# EAGLE board lightmeter_proto3 (EAGLE 7.1.0)
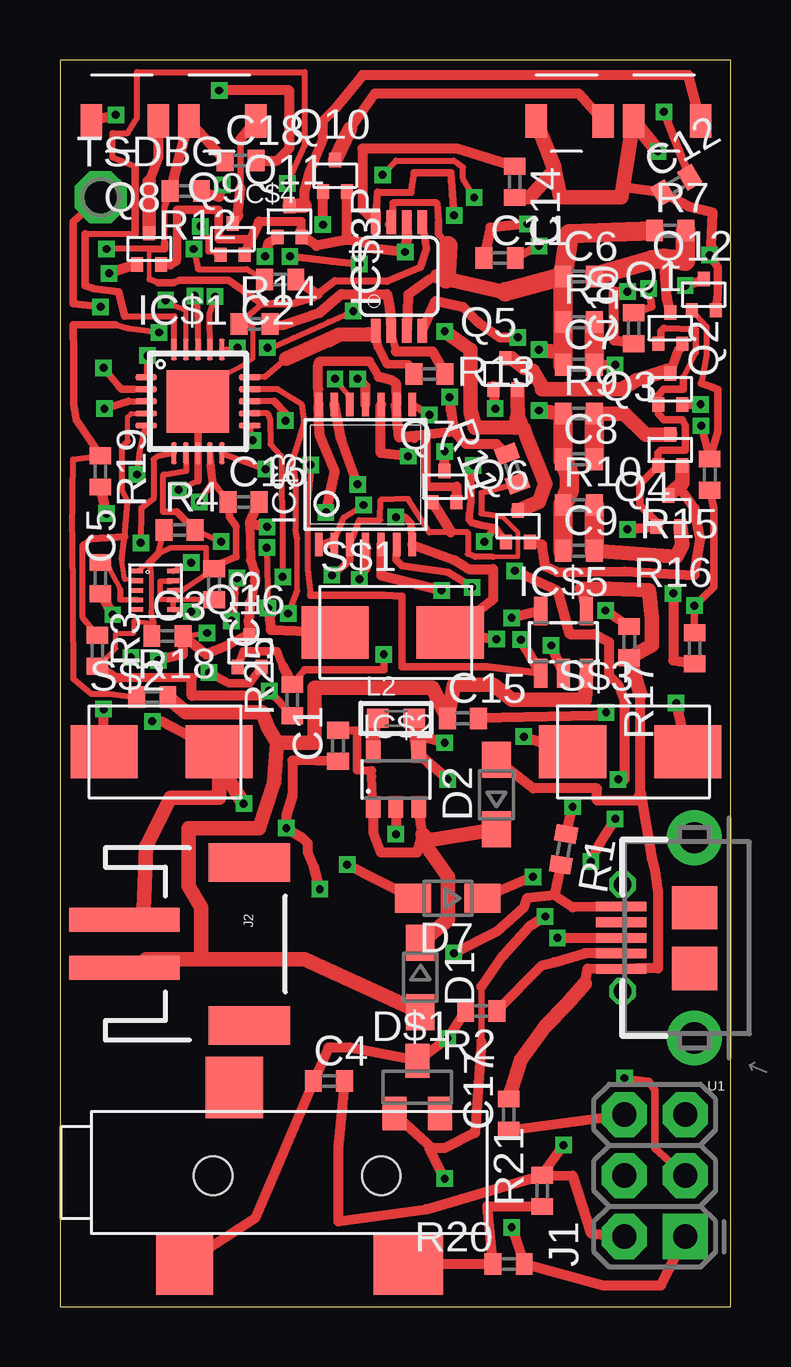
[diagram p0: board, top side]
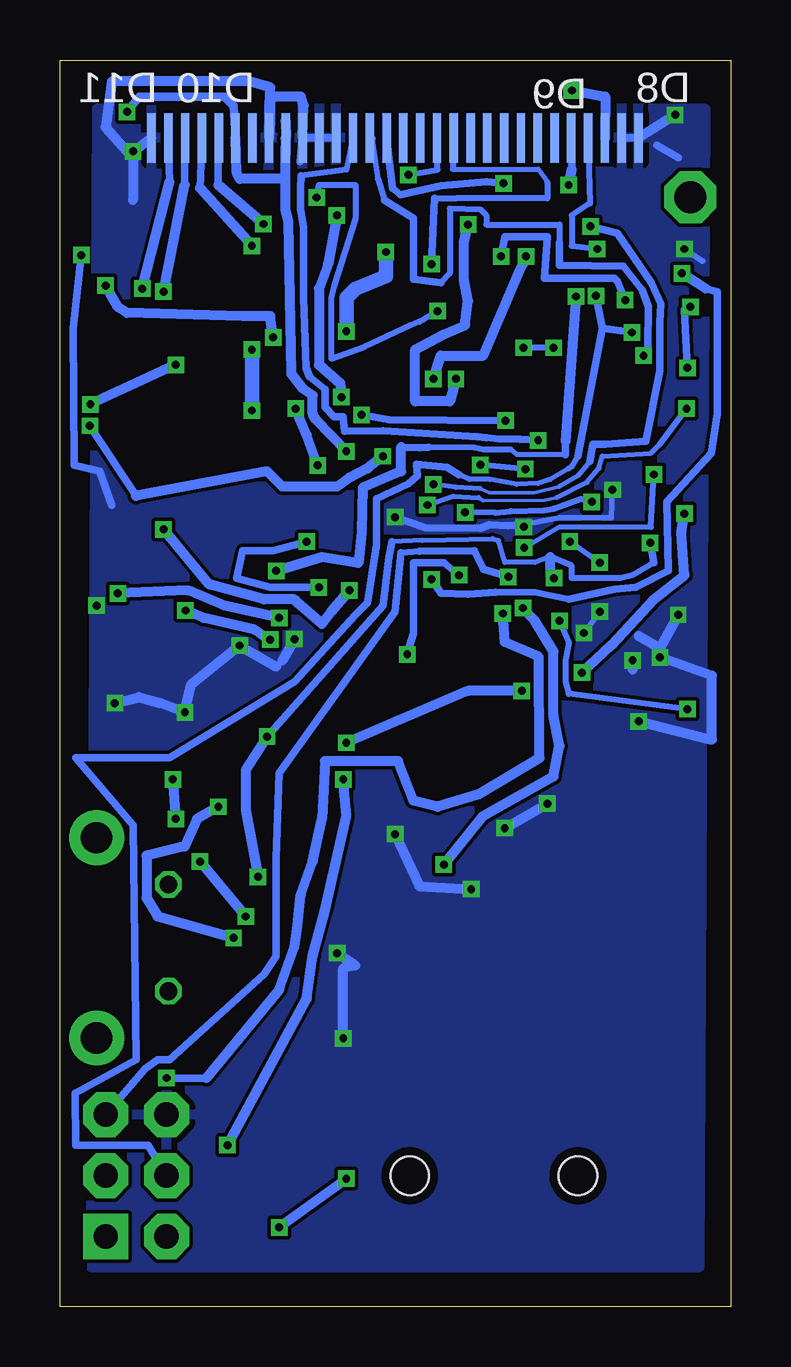
[diagram p1: board, bottom side, seen from below]

Size 27.98 x 51.94 mm. Coordinates in mm from the lower left corner, seen from the top.
Outline: 0,0 27.98,0 27.98,51.94 0,51.94 0,0
Copper layers (1*16): Top 0.0356mm / dielectric 1.5011mm / Bottom 0.0356mm
Design rules "LaenPCBOrder": minimum track width 6mil, minimum drill 13mil, track to track 6mil, track to pad 6mil, pad to pad 6mil, via to via 6mil, smd to smd 6mil, copper to edge 15mil, drill to drill 6mil, minimum pad ring 7mil, minimum via ring 7mil, stop-mask expansion 3mil, vias tented up to drill 0mil, thermal gap 10mil

## Footprints (pad centres in the part's own frame; a part is rotated, then mirrored left to right if it is on the bottom)
C0402 = smd 0.7 x 0.9: 1 -0.65,0; 2 0.65,0
SOD323-W = smd 1.5 x 1.2: A 1.45,0; C -1.45,0
VEMD2523SLX01 = smd 0.889 x 1.397: P$1 -3.81,3.81; P$2 -1.016,3.81
SOT23 = smd 1 x 1.4: 1 -0.95,-1.1; 2 0.95,-1.1; 3 0,1.1
MLF20 = smd 0.9 x 0.23: 1 -2.159,1.001; 2 -2.159,0.5; 3 -2.159,0; 4 -2.159,-0.5; 5 -2.159,-1.001; 11 2.159,-1.001; 12 2.159,-0.5; 13 2.159,0; 14 2.159,0.5; 15 2.159,1.001 | smd 0.23 x 0.9: 6 -1.001,-2.159; 7 -0.5,-2.159; 8 0,-2.159; 9 0.5,-2.159; 10 1.001,-2.159; 16 1.001,2.159; 17 0.5,2.159; 18 0,2.159; 19 -0.5,2.159; 20 -1.001,2.159 | smd 2.6 x 2.6: GND 0,0
SOT23-5 = smd 0.6 x 0.9: 1 -0.95,-1.15; 2 0,-1.15; 3 0.95,-1.15; 4 0.95,1.15; 5 -0.95,1.15
TSSOP14 = smd 0.305 x 0.991: 1 -1.95,-2.918; 2 -1.3,-2.918; 3 -0.65,-2.918; 4 0,-2.918; 5 0.65,-2.918; 6 1.3,-2.918; 7 1.95,-2.918; 8 1.95,2.918; 9 1.3,2.918; 10 0.65,2.918; 11 0,2.918; 12 -0.65,2.918; 13 -1.3,2.918; 14 -1.95,2.918
MSOP08 = smd 0.4 x 1: 1 -0.976,-2.263; 2 -0.326,-2.263; 3 0.324,-2.263; 4 0.974,-2.263; 5 0.974,2.262; 6 0.324,2.262; 7 -0.326,2.262; 8 -0.976,2.262
UG-2864HSWEG01_0.96IN_WRAPAROUND = smd 0.35 x 2.057 bottom: 1 -10.15,-1.2; 2 -9.45,-1.2; 3 -8.75,-1.2; 4 -8.05,-1.2; 5 -7.35,-1.2; 6 -6.65,-1.2; 7 -5.95,-1.2; 8 -5.25,-1.2; 9 -4.55,-1.2; 10 -3.85,-1.2; 11 -3.15,-1.2; 12 -2.45,-1.2; 13 -1.75,-1.2; 14 -1.05,-1.2; 15 -0.35,-1.2; 16 0.35,-1.2; 17 1.05,-1.2; 18 1.75,-1.2; 19 2.45,-1.2; 20 3.15,-1.2; 21 3.85,-1.2; 22 4.55,-1.2; 23 5.25,-1.2; 24 5.95,-1.2; 25 6.65,-1.2; 26 7.35,-1.2; 27 8.05,-1.2; 28 8.75,-1.2; 29 9.45,-1.2; 30 10.15,-1.2
SOT23-5L = smd 0.55 x 1.2: 1 -0.95,-1.3; 2 0,-1.3; 3 0.95,-1.3; 4 0.95,1.3; 5 -0.95,1.3
DFN-10 = smd 0.191 x 0.5: P$1 -0.8,-0.749; P$2 -0.4,-0.749; P$3 0,-0.749; P$4 0.4,-0.749; P$5 0.8,-0.749; P$6 0.8,0.749; P$7 0.4,0.749; P$8 0,0.749; P$9 -0.4,0.749; P$10 -0.8,0.749
2X3-NS = drill 1.016 pad 1.88 square: 1 -2.54,-1.27 | drill 1.016 pad 1.88 octagon: 2 -2.54,1.27; 3 0,-1.27; 4 0,1.27; 5 2.54,-1.27; 6 2.54,1.27
JST-2-SMD = smd 1 x 4.6: 1 -1,-3.7; 2 1,-3.7 | smd 1.6 x 3.4: NC1 -3.4,1.5; NC2 3.4,1.5
_0603 = smd 0.9 x 0.8: 1 -0.762,0; 2 0.762,0
SOT-416-3 = smd 0.5 x 0.6: P$1 -0.5,-0.9; P$2 0.5,-0.9; P$3 0,0.4
R0402 = smd 0.7 x 0.9: 1 -0.65,0; 2 0.65,0
BUTTON = smd 2.8 x 2.2: P$1 -2.54,0; P$3 2.26,0
P1-13 = drill 1.321 pad 2.159 octagon: TP 0,0
USB-AB-MICRO = smd 2.1 x 0.4: D+ 3.05,0; D- 3.05,0.65; GND 3.05,-1.3; ID 3.05,-0.65; VBUS 3.05,1.3 | drill 1.3 pad 2.286: P$1 0,-4.175; P$2 0,4.175 | drill 0.737 pad 0.762 octagon: P$3 3,-2.225; P$4 3,2.225 | smd 1.9 x 1.8: P$6 0,1.275; P$7 0,-1.25
3TRS-SMD = smd 2.388 x 2.553: P$1 -6.274,-1.27; P$2 -4.191,6.083 | smd 2.896 x 2.553: P$3 3.048,-1.27 | hole 1.6: -5.08,2.407; 1.93,2.407

## Placement (x,y rotation side)
C1  4u7  [C0402]  11.6,23.37 90 top
C2  2u2  [C0402]  9.18,42.8 180 top
C3  1u  [C0402]  4.48,27.94 0 top
C4  u1  [C0402]  11.21,9.4 0 top
C5  u1  [C0402]  1.69,30.35 90 top
C6  4u7  [C0402]  21.63,42.93 0 top
C7  4u7  [C0402]  21.63,39.24 0 top
C8  4u7  [C0402]  21.63,35.31 0 top
C9  4u7  [C0402]  21.63,31.5 0 top
C10  1u  [C0402]  23.91,40.77 90 top
C11  1u  [C0402]  18.33,43.69 0 top
C12  4u7  [C0402]  25.69,46.74 30 top
C13  u1  [C0402]  6.43,30.1 270 top
C14  u1  [C0402]  18.96,46.86 270 top
C15  4u7  [C0402]  16.8,24.51 0 top
C16  u1  [C0402]  7.66,33.53 0 top
C17  4u7  [C0402]  18.71,8 90 top
C18  2u2  [C0402]  7.53,47.75 0 top
D1  [SOD323-W]  15.02,13.72 270 top
D2  [SOD323-W]  18.2,21.34 90 top
D7  [SOD323-W]  16.17,17.02 180 top
D8  VEMD2523SLX01  [VEMD2523SLX01]  5.12,45.59 0 top
D9  VEMD2523SLX01  [VEMD2523SLX01]  9.18,45.59 0 top
D10  VEMD2523SLX01  [VEMD2523SLX01]  23.66,45.59 0 top
D11  VEMD2523SLX01  [VEMD2523SLX01]  27.72,45.59 0 top
D$1  GSOT04-E3-08  [SOT23]  14.9,9.14 0 top
IC$1  ATTINY1634MLF20  [MLF20]  5.75,37.72 0 top
IC$2  LM3671  [SOT23-5]  14.01,21.97 0 top
IC$3  SN74HC164TSSOP-14  [TSSOP14]  12.74,34.67 0 top
IC$3P  AD8542RM  [MSOP08]  14.14,42.93 0 top
IC$4  [UG-2864HSWEG01_0.96IN_WRAPAROUND]  14.01,47.5 180 top
IC$5  MCP73831/OT  [SOT23-5L]  20.99,27.69 0 top
IC$6  MMA8653  [DFN-10]  3.98,29.84 270 top
J1  AVR_SPI_PRG_6NS  [2X3-NS]  24.8,5.46 90 top
J2  [JST-2-SMD]  6.39,15.11 270 top
L2  2u2  [_0603]  14.01,24.51 0 top
Q1  NCHANNELMOSFET  [SOT-416-3]  25.44,41.02 0 top
Q2  PCHANNELMOSFET  [SOT-416-3]  25.44,38.48 0 top
Q3  NCHANNELMOSFET  [SOT-416-3]  25.44,35.94 0 top
Q4  PCHANNELMOSFET  [SOT-416-3]  25.36,33.4 0 top
Q5  NCHANNELMOSFET  [SOT-416-3]  18.58,39.12 0 top
Q6  PCHANNELMOSFET  [SOT-416-3]  19.09,32.77 0 top
Q7  PCHANNELMOSFET  [SOT-416-3]  16.04,34.42 0 top
Q8  NCHANNELMOSFET  [SOT-416-3]  3.72,44.32 0 top
Q9  NCHANNELMOSFET  [SOT-416-3]  7.2,44.73 0 top
Q10  NCHANNELMOSFET  [SOT-416-3]  11.47,47.37 0 top
Q11  NCHANNELMOSFET  [SOT-416-3]  9.56,45.47 0 top
Q12  NCHANNELMOSFET  [SOT-416-3]  26.84,42.42 0 top
Q16  PCHANNELMOSFET  [SOT-416-3]  7.91,27.56 0 top
R1  15k  [R0402]  20.99,19.05 80 top
R2  15k  [R0402]  17.56,12.32 0 top
R3  1k  [R0402]  1.56,27.33 90 top
R4  1k  [R0402]  4.99,32.36 0 top
R7  750k%  [R0402]  25.44,44.83 0 top
R8  97.5k%  [R0402]  21.63,41.02 0 top
R9  13k%  [R0402]  21.63,37.21 0 top
R10  1k6%  [R0402]  21.63,33.4 0 top
R11  10k  [R0402]  18.86,34.93 110 top
R12  390k  [R0402]  5.25,46.48 0 top
R13  ???%  [R0402]  15.41,38.86 0 top
R14  ???%  [R0402]  8.12,40.94 0 top
R15  10k  [R0402]  27.09,34.67 270 top
R16  10k  [R0402]  26.45,27.43 90 top
R17  10k  [R0402]  23.74,27.69 270 top
R18  10k  [R0402]  3.85,25.4 0 top
R19  6k8%  [R0402]  1.69,34.8 90 top
R20  6k8  [R0402]  18.71,1.78 180 top
R21  16k  [R0402]  20.1,4.83 90 top
R25  10k  [R0402]  9.69,25.27 90 top
S$1  SMALLPUSHBUTTON  [BUTTON]  14.01,28.09 0 top
S$2  SMALLPUSHBUTTON  [BUTTON]  4.38,23.11 0 top
S$3  SMALLPUSHBUTTON  [BUTTON]  23.91,23.11 0 top
TSDBG  TPPAD1-13  [P1-13]  1.69,46.23 0 top
U1  [USB-AB-MICRO]  26.45,15.37 180 top
U$3  3TRS_PHONE_JACK  [3TRS-SMD]  11.47,3.05 0 top

## Library data of the parts
C1-C18 = rcl
D1 D2 D7 = diode2
D8-D11 D$1 IC$2 IC$3 IC$6 Q1-Q12 Q16 R13 S$1-S$3 U1 U$3 = lightmeter
IC$1 = attiny1634_corrected
IC$3P = analog-devices; MPN: AD8542ARZ; OC_FARNELL: 1464965; OC_NEWARK: 19M0965
IC$4 L2 = microbuilder
IC$5 = adafruit
J1 = SparkFun-Connectors
J2 = SparkFun-Connectors; PROD_ID: CONN-08352
R1-R4 R7-R12 R14-R21 R25 = resistor; SPICEPREFIX: R
TSDBG = testpad

## Nets
ACCSCL: IC$1.4 IC$6.P$2 R3.2
ACCSDA: IC$1.7 IC$6.P$10 R4.2
AVRMISO/FLASHSYNC: D$1.1 IC$1.17 J1.1 R20.1
AVRMOSI/BATVOLTAGE: IC$1.18 J1.4 R18.1 R19.2
AVRRST: IC$1.12 J1.5
AVRSCK: IC$1.14 J1.3
BATSTAT: IC$1.10 IC$5.1 R17.1
DIODESW$1: IC$3.4 Q8.P$1
DIODESW$2: IC$3.13 Q9.P$1
DIODESW$3: IC$3.12 Q10.P$1
DIODESW$4: IC$3.11 Q11.P$1
GND: C1.1 C2.1 C3.2 C4.1 C5.1 C12.1 C13.2 C14.2 C15.2 C16.2 C17.1 C18.1 D8.P$1 D9.P$1 D10.P$1 D11.P$1 D$1.3 IC$1.8 IC$1.GND IC$2.2 IC$3.7 IC$3P.5 IC$4.1 IC$4.8 IC$4.10 IC$4.11 IC$4.12 IC$4.29 IC$4.30 IC$5.2 IC$6.P$6 IC$6.P$7 IC$6.P$9 J1.6 J2.1 Q12.P$2 Q16.P$3 R1.1 R2.1 R12.1 R14.1 R15.2 R16.2 S$1.P$3 S$2.P$3 S$3.P$3 U1.GND U$3.P$1
N$1: D8.P$2 Q8.P$3
N$2: D9.P$2 Q9.P$3
N$3: C7.2 Q2.P$2 R8.2
N$4: C9.2 Q4.P$2 R10.2
N$5: IC$5.5 R16.1
N$6: IC$3P.4 Q12.P$3
N$7: C5.2 IC$6.P$4
N$9: D10.P$2 Q10.P$3
N$10: IC$2.5 L2.1
N$11: D11.P$2 Q11.P$3
N$12: C2.2 IC$4.27
N$14: C8.2 Q3.P$3 R9.2
N$15: C10.2 IC$4.2
N$16: C10.1 IC$4.3
N$17: Q16.P$2 R19.1
N$19: IC$4.26 R12.2
N$20: Q1.P$2 Q2.P$3 Q5.P$3
N$21: C6.2 Q1.P$3 R7.2
N$22: Q3.P$2 Q4.P$3 Q6.P$2
N$23: IC$1.2 TSDBG.TP
N$24: C11.1 IC$4.5
N$26: IC$3P.6 Q5.P$2 Q6.P$3 Q8.P$2 Q9.P$2 Q10.P$2 Q11.P$2
N$27: C11.2 IC$4.4
N$28: R1.2 U1.D+
N$29: R20.2 R21.1 U$3.P$3
N$30: C18.2 IC$4.28
N$31: IC$3P.2 R13.2 R14.2
N$32: R2.2 U1.D-
OAOUT1: C6.1 C7.1 C8.1 C9.1 IC$3P.3 IC$3P.7 R7.1 R8.1 R9.1 R10.1
OAOUT2: IC$1.15 IC$3P.1 R13.1
OAPWR: IC$3.10 Q12.P$1 R15.1
PBI$1: D7.A IC$1.5 S$1.P$1
PBI$2: D7.C IC$1.6 S$2.P$1 S$3.P$1
SCRCLK: IC$1.16 IC$4.18
SCRCS: IC$1.11 IC$4.13
SCRDAT: IC$1.19 IC$4.19
SCRDC: IC$1.20 IC$4.15
SCRPWR: IC$3.3 Q7.P$1 Q16.P$1 R11.1 R25.2
SCRRES: IC$1.1 IC$4.14
SCRVREG: C12.2 IC$4.6 IC$4.9 Q7.P$3
SRA: IC$1.3 IC$3.1 IC$3.2
SRCLK: IC$1.13 IC$3.8
STG$1: IC$3.5 Q1.P$1 Q2.P$1 Q3.P$1 Q4.P$1
STG$2: IC$3.6 Q5.P$1 Q6.P$1
VBAT: C15.1 D1.A IC$5.3 J2.2 R18.2
VCC: C1.2 D1.C D2.C IC$2.1 IC$2.3
VREG: C3.1 C4.2 C13.1 C14.1 C16.1 IC$1.9 IC$2.4 IC$3.9 IC$3.14 IC$3P.8 IC$6.P$1 IC$6.P$8 J1.2 L2.2 Q7.P$2 R3.1 R4.1 R11.2 R21.2 R25.1
VUSB: C17.2 D2.A IC$5.4 R17.2 U1.VBUS

## Tracks (layer width: path | path; a pad name or v marks a point on that pad's centre or on a via)
ACCSCL
  Top 0.203: IC$6.P$2 2.71,30.3 2.58,31.12 | 2.83,36.07 2.83,37.08 2.96,37.21 IC$1.4
  Top 0.254: 2.58,31.12 2.71,32.08 2.83,33.53 2.58,34.04 2.58,35.81 2.83,36.07 | R3.2 0.95,28.7 0.95,31.75 1.31,32
  Top 0.305: 1.31,32 2.71,32.08
ACCSDA  (via drill 0.33)
  Top 0.229: IC$6.P$10 v5.47,31 | R4.2 v6.72,31.88
  Top 0.254: IC$1.7 5.28,34.83 4.31,34.67 4.31,33.12
  Top 0.279: 4.31,33.12 4.86,33.12
  Top 0.305: 4.86,33.12 R4.2
  Bottom 0.229: v5.47,31 v6.72,31.88
AVRMISO/FLASHSYNC  (via drill 0.33)
  Top 0.229: 6.24,41.39 v6.46,42.09
  Top 0.254: IC$1.17 6.24,41.39
  Top 0.279: 17.56,11.05 17.56,13.34
  Top 0.406: v18.96,30.66 20.74,29.84 21.25,28.02 22.26,28.02 22.9,27.69 22.9,26.29 23.28,25.91 23.53,25.27 23.53,21.97 v23.28,21.97 | v22.14,18.54 22.52,19.3 v23.15,20.32 | v20.23,16.26 19.6,15.88 18.45,14.61 17.56,13.34 | J1.1 25.06,0.89 22.64,0.89 R20.1 v18.83,3.3 | 17.56,11.05 17.31,7.24 16.04,6.6 15.4,6.59 | 15.4,6.59 15.53,6.6 D$1.1 | v16.04,5.33 15.4,6.59
  Bottom 0.203: 6.9,35.5 8.93,35.5 9.18,35.71
  Bottom 0.254: 12.61,35.81 10.71,35.79 10.33,35.71 9.18,35.71
  Bottom 0.305: 6.9,36.07 6.9,35.5 | 13.75,35.81 12.99,35.79 12.61,35.81
  Bottom 0.406: v6.46,42.09 6.9,36.07 | v22.14,18.54 v20.23,16.26 | v18.96,30.66 17.06,31.24 15.53,30.99 15.41,32.26 15.35,34.11 13.75,34.8 13.75,35.81 | v23.28,21.97 v23.15,20.32 | v18.83,3.3 v16.04,5.33
AVRMOSI/BATVOLTAGE  (via drill 0.33)
  Top 0.254: 2.32,40.92 2.83,40.77 3.21,40.72 v4.13,40.59 | R19.2 0.55,35.31 0.52,32.26 0.55,26.16 1.31,25.53 2.07,25.53 R18.1 | v5.63,42.11 5.73,41.66 IC$1.18
  Top 0.305: 2.32,40.92 0.55,40.92 0.57,39.62 0.57,37.59 0.67,36.96 R19.2
  Bottom 0.203: 6.77,34.93 7.53,34.47 8.04,34.3 8.93,34.27 10.07,34.47 10.91,34.47 11.34,34.67
  Bottom 0.254: 6.39,35.43 6.64,35 6.77,34.93
  Bottom 0.305: 6.39,35.43 5.37,40.77 | 5.37,40.77 v5.63,42.11 | 11.34,34.67 11.85,34.98 13.12,35.1 13.07,34.62 13.45,34.29 14.77,33.66 14.77,31.75 15.15,29.34 15.66,28.83 18.2,26.04 23.41,22.86 27.32,22.86 24.93,20.07 24.8,10.29 27.34,8.89 27.32,6.73 24.3,6.73 J1.4 | v4.13,40.59 5.37,40.77
AVRRST  (via drill 0.33)
  Top 0.254: v9.28,30.4 9.28,33.02 9.23,33.78 9.23,35.43 8.78,35.94 8.75,36.96 8.67,37.22 IC$1.12
  Bottom 0.279: 12.99,31.47 13.75,31.42
  Bottom 0.305: 13.75,31.42 14.01,28.96 18.83,22.23 18.96,18.67 18.96,14.61 19.47,13.84 23.41,10.29 23.91,10.29 24.42,9.91 J1.5 | 12.99,31.47 10.71,31.5 10.33,30.73 v9.28,30.4
AVRSCK  (via drill 0.33)
  Top 0.229: 9.89,32 9.89,29.84
  Top 0.254: 9.89,29.84 v9.51,28.88 | 9.89,32 9.82,32.38 9.82,34.42 9.67,35.18 9.87,35.81 10.17,36.83 10.07,37.59 9.06,38.23 IC$1.14
  Top 0.305: J1.3 24.8,6.6 24.8,9.02 24.55,9.4 v23.53,9.52
  Bottom 0.305: 21.88,9.52 v23.53,9.52
  Bottom 0.406: 21.88,9.52 18.83,13.21 18.2,14.99 18.07,15.88 17.95,17.14 17.44,18.54 17.06,20.32 16.93,22.73 13.88,22.73 13.25,21.08 12.23,20.83 10.58,21.34 7.99,22.86 8.01,27.08 9.44,27.69 v9.51,28.88
BATSTAT  (via drill 0.33)
  Top 0.254: IC$1.10 v8.57,34.9 | v10.45,35.08 10.45,34.67 10.33,33.53 10.33,30.73 10.45,29.64
  Top 0.305: 10.45,29.64 13.5,29.64 14.26,29.59 14.26,26.67 17.82,26.67 IC$5.1
  Top 0.406: IC$5.1 v19.22,27.79 | v22.75,29.01 R17.1
  Bottom 0.254: v8.57,34.9 v10.45,35.08
  Bottom 0.406: v22.75,29.01 22.01,28.7 19.85,28.19 19.47,27.94 v19.22,27.79
DIODESW$1  (via drill 0.33)
  Top 0.305: 12.74,30.73 v12.48,30.3
  Top 0.406: Q8.P$1 v2.05,43.05 | IC$3.4 12.74,30.73
  Bottom 0.279: 9.82,29.77 8.17,29.77 6.77,29.46
  Bottom 0.305: v12.48,30.3 12.1,29.72 10.96,29.69 9.82,29.77 | 1.05,42.42 0.57,42.29 0.57,37.21 0.83,35.56 2.68,33.53 2.6,30.66 3.98,29.97 4.86,29.9 6.77,29.46
  Bottom 0.406: 1.05,42.42 1.44,42.67 v2.05,43.05
DIODESW$2  (via drill 0.33)
  Top 0.203: Q9.P$1 6.39,43.94 6.18,43.94 6.18,44.58 v5.86,45.01
  Top 0.406: v12.41,34.27 11.72,36.16 IC$3.13
  Bottom 0.152: 7.18,34.16 8.19,33.91 10.07,33.91 10.45,34.09
  Bottom 0.203: 5.88,35.23 6.39,34.62 7.18,34.16 | v12.41,34.27 11.47,34.14 10.45,34.09
  Bottom 0.305: v5.86,45.01 4.74,44.73 3.32,42.67 2.93,41.78 2.96,41.02 2.96,38.99 3.54,36.07 5.25,35.94 5.75,35.94 5.88,35.23
DIODESW$3  (via drill 0.33)
  Top 0.203: 12,37.99 v11.47,38.66
  Top 0.254: 12,37.99 IC$3.12
  Top 0.406: v10.96,45.09 Q10.P$1
  Bottom 0.406: v11.47,38.66 11.72,37.72 13.17,37.72 13.17,39.88 11.98,40.51 11.09,40.89 10.96,41.91 11.14,42.8 11.14,44.32 v10.96,45.09
DIODESW$4  (via drill 0.33)
  Top 0.406: Q11.P$1 8.69,44.31 v8.55,43.76 | IC$3.11 12.74,38.35 v12.41,38.66
  Bottom 0.406: v8.55,43.76 8.67,43.43 8.8,43.18 10.33,39.62 12.1,39.62 v12.41,38.66
GND  (via drill 0.33)
  Top 0.191: 3.72,42.8 3.72,44.06
  Top 0.203: R14.1 8.04,40.89 8.04,39.5 7.53,39.17 6.39,38.61 IC$1.GND | 7.91,28.19 7.91,28.07 Q16.P$3
  Top 0.229: IC$6.P$7 5.25,29.46 5.63,29.46 C13.2 | IC$6.P$7 IC$6.P$6 v5.47,28.96 | C3.2 v6.13,28.07 | 4.18,30.23 4.18,29.46 IC$6.P$7 | 4.18,30.23 IC$6.P$9 | 4.18,30.23 4.61,30.23 | 5.75,34.42 v4.94,34.04
  Top 0.254: R14.1 8.42,41.78 | 4.1,42.67 3.72,42.8 | 4.36,44.32 4.36,45.85 | 4.36,45.85 R12.1 | 4.74,46.86 4.48,46.36 4.36,45.85 | 4.61,46.48 4.36,45.85 | 4.36,44.07 v1.94,44.07
  Top 0.305: 4.36,44.32 4.36,44.07 3.72,44.06 | 5.75,34.42 IC$1.8 IC$1.GND | v14.01,32.89 14.39,32.89 14.64,32.64 IC$3.7 | 4.1,42.67 4.74,42.67 4.99,42.77 7.02,42.77 8.42,41.78 9.69,41.78 10.58,42.04 10.75,42.17 11.47,42.75 13.63,42.72 15.02,43.31 15.28,44.07 IC$3P.5 | R15.2 27.27,33.27 27.27,29.97 v26.45,29.21 R16.2 | 27.17,44.2 v27.09,43.81
  Top 0.356: v27.09,43.81 27.42,43.31 27.42,42.16 Q12.P$2 | 4.61,46.74 4.61,46.48
  Top 0.381: 7.91,28.07 7.02,27.56 | 7.91,32.64 7.94,31.12 8.12,30.61 | 8.13,30.23 7.93,29.34
  Top 0.406: C15.2 22.26,24.62 v22.77,24.77 | D8.P$1 v2.32,49.66 | R12.1 D9.P$1 C18.1 | J2.1 3.47,16 | R1.1 20.61,17.14 | IC$2.2 v14.01,19.69 | C1.1 9.69,22.76 9.69,21.34 9.44,20.45 v9.44,19.94 10.07,19.56 10.33,19.3 10.33,18.92 10.58,18.34 v10.83,17.4 | IC$5.2 v20.49,27.55 | v18.2,27.81 S$1.P$3 18.07,29.46 18.07,30.73 17.06,30.73 16.42,31.12 IC$3.7 | S$3.P$3 v25.69,25.15 | 27.17,44.2 27.22,45.59 26.2,45.85 C12.1 23.47,46.64 | 7.02,27.56 6.08,27.18 C3.2 5.12,27.18 v4.1,26.92 | 7.91,28.32 7.91,28.19 | C16.2 7.91,32.64 v8.64,32.49 | U$3.P$1 8.14,3.68 C4.1 11.19,10.8 12.1,10.8 D$1.3 v16.17,11.18 R2.1 | C17.1 J1.6 | S$2.P$3 4.23,24.38 v3.85,24.38 | C5.1 v2.2,28.83 | C2.1 10.75,42.17 | U1.GND 21.37,16.64 20.61,17.14 | Q16.P$3 7.86,28.58 7.93,29.34 | 8.12,30.61 8.13,30.23 | 20.61,17.14 19.47,17.02 19.34,16.64 18.2,15.62 v16.42,14.73
  Top 0.61: S$2.P$3 6.64,22.61 | 6.64,22.61 6.64,21.21 4.61,21.21 3.59,19.18 3.47,16 | v24.93,48.13 D11.P$1 23.47,46.64 23.41,46.23 20.87,46.23 20.61,47.37 | 20.61,47.37 D10.P$1 20.61,47.5 | v7.66,20.96 6.64,22.61 | 20.61,47.37 19.6,46.23 C14.2
  Bottom 0.229: v6.13,28.07 v5.47,28.96 | v4.94,34.04 4.99,32.87 7.15,32.87 8.8,32.56
  Bottom 0.254: v1.94,44.07 1.18,43.56
  Bottom 0.305: IC$4.30 IC$4.29 | 3.09,48.39 2.2,47.88 | v14.01,32.89 12.74,32.46 10.45,32.44 10.07,32.59 9.31,32.54 9.06,32.56 8.8,32.56 | 17.96,47.7 IC$4.10 IC$4.11 IC$4.12 | 25.82,33.4 26.33,34.8 27.39,35.05 27.42,40.77 v27.09,43.81
  Bottom 0.406: v2.32,49.66 IC$4.30 | v14.01,19.69 12.99,17.53 v10.83,17.4 | v9.44,19.94 v7.66,20.96 | v18.2,27.81 18.71,26.92 | 18.96,26.67 v20.49,27.55 22.52,25.91 v22.77,24.77 23.79,25.15 24.68,25.4 v25.69,25.15 | 24.93,46.1 v24.93,48.13 25.18,48.13 | IC$4.1 25.06,48.01 25.18,48.13 | v8.64,32.49 8.8,32.56 | v2.2,28.83 2.96,27.43 3.85,27.94 | IC$4.10 17.82,50.04 17.95,50.42 18.96,50.42 19.22,50.29 19.22,49.4 IC$4.8 19.22,50.8 20.1,51.05 25.82,51.05 26.07,49.15 25.18,48.13 | v16.17,11.18 16.17,14.1 15.66,14.22 v16.42,14.73 | v3.85,24.38 0.8,23.62 0.8,26.29 v2.96,27.05 | v4.1,26.92 4.1,26.54
  pour Bottom: 1.05,49.91 26.45,49.91 26.71,1.65 1.31,1.65
N$1
  Top 0.406: D8.P$2 4.1,47.88 3.72,46.86
  Top 0.559: Q8.P$3 3.72,46.86
N$2
  Top 0.279: 7.53,46.61 7.53,48.64
  Top 0.406: 7.4,45.47 7.53,46.61 | 7.53,48.64 D9.P$2
  Top 0.508: Q9.P$3 7.4,45.47
N$3  (via drill 0.33)
  Top 0.406: C7.2 v23.15,39.24 | v26.71,37.59 Q2.P$2
  Top 0.813: C7.2 R8.2
  Bottom 0.406: v23.15,39.24 v26.71,37.59
N$4
  Top 0.61: Q4.P$2 25.94,31.74 25.69,31.24 C9.2
  Top 0.813: R10.2 C9.2
N$5  (via drill 0.33)
  Top 0.406: IC$5.5 v18.83,28.7 | v25.57,29.72 25.57,26.92 R16.1
  Bottom 0.406: v18.83,28.7 21.12,29.21 22.64,29.84 v25.57,29.72
N$6  (via drill 0.33)
  Top 0.406: IC$3P.4 15.66,41.91 16.8,41.66 17.44,41.02 18.33,40.39 v19.09,40.39 | v26.07,42.55 Q12.P$3
  Bottom 0.406: v19.09,40.39 19.22,41.27 20.36,41.27 25.18,41.4 25.57,41.66 v26.07,42.55
N$7
  Top 0.203: 2.07,30.73 2.5,29.91
  Top 0.254: C5.2 2.07,30.73 | 2.5,29.91 2.5,29.46 IC$6.P$4
N$9
  Top 0.406: D10.P$2 21.63,50.55 13.12,50.55 12.08,49.07
  Top 0.61: 12.08,49.07 Q10.P$3
N$10
  Top 0.406: L2.1 13.06,24.07
  Top 0.61: 13.06,24.07 IC$2.5
N$11
  Top 0.406: 10.2,45.87 10.2,46.48 10.45,47.37 10.96,48.64 10.96,49.4 11.47,49.91 12.61,51.31 26.2,51.31 D11.P$2
  Top 0.61: Q11.P$3 10.2,45.87
N$12  (via drill 0.33)
  Top 0.254: v5.58,44.07 5.75,43.23 7.79,43.23 C2.2
  Bottom 0.254: IC$4.27 5.88,45.97 6.64,45.47 6.64,44.2 v5.58,44.07
N$14
  Top 0.61: R9.2 23.53,37.21 24.42,36.32 25.42,36.32 Q3.P$3
  Top 0.813: C8.2 R9.2
N$15  (via drill 0.33)
  Top 0.305: C10.2 24.68,41.66 v24.55,42.42
  Bottom 0.305: 23.41,46.86 IC$4.2
  Bottom 0.406: v24.55,42.42 23.41,46.86
N$16  (via drill 0.33)
  Top 0.406: C10.1 23.1,40.26 23.1,42.29 v23.66,42.29
  Bottom 0.305: 22.77,46.74 IC$4.3
  Bottom 0.406: v23.66,42.29 22.77,46.74
N$17  (via drill 0.33)
  Top 0.356: v6.21,26.42 7.02,25.98 7.91,25.98 Q16.P$2
  Top 0.406: v1.94,33.05 R19.1
  Bottom 0.406: v6.21,26.42 4.99,27.56 3.21,29.46 1.94,30.48 2.07,32.26 v1.94,33.05
N$19  (via drill 0.33)
  Top 0.406: R12.2 6.64,46.23 v6.77,46.74
  Bottom 0.305: 6.64,47.37 IC$4.26
  Bottom 0.406: v6.77,46.74 6.64,47.37
N$20
  Top 0.254: 25.81,39.89 Q1.P$2
  Top 0.406: 25.81,39.89 Q2.P$3 25.29,38.99
  Top 0.61: Q5.P$3 18.82,39.52 19.34,39.12 19.72,38.99 20.1,38.35 20.1,38.23 23.41,38.23 24.04,38.61 25.29,38.99
N$21
  Top 0.406: Q1.P$3 25.31,42.04 25.18,43.69
  Top 0.813: R7.2 26.07,44.82 26.07,43.56 25.76,43.62 25.18,43.69 24.68,43.61 C6.2
N$22
  Top 0.406: 25.81,34.17 26.45,33.27 26.71,32 26.45,30.48 23.53,30.63 20.74,30.61 20.23,30.84 20.1,31.75 Q6.P$2
  Top 0.61: Q3.P$2 25.94,34.3 25.81,34.17 Q4.P$3
N$23  (via drill 0.33)
  Top 0.254: 3.09,38.23 IC$1.2
  Top 0.305: 3.09,38.23 2.58,38.23 2.45,38.35 v1.82,39.12 | v1.69,41.66 0.55,41.78 0.55,45.21 TSDBG.TP
  Bottom 0.305: v1.82,39.12 1.94,41.53 v1.69,41.66
N$24  (via drill 0.33)
  Top 0.406: v19.49,45.11 17.95,44.96 C11.1
  Bottom 0.305: 21.37,46.74 IC$4.5
  Bottom 0.406: v19.49,45.11 21.37,46.74
N$26  (via drill 0.33)
  Top 0.254: 7.91,44.48 7.87,44.29
  Top 0.353: 6.62,44.48 7.91,44.48
  Top 0.356: 4.61,43.41 4.86,43.56 4.89,43.69 4.89,45.7 6.62,45.7 6.62,44.48
  Top 0.381: 10.06,44.69 10.07,45.21 8.29,45.21
  Top 0.406: 11.98,44.45 10.69,44.2 10.57,44.31 | 10.57,44.31 Q11.P$2 | 10.06,44.69 10.57,44.31 | 7.66,43.92 Q9.P$2 7.87,44.29 8.29,45.21 | 4.61,43.41 Q8.P$2 | 11.98,44.45 12.74,44.32 13.12,44.07 v14.39,43.94 14.5,44.54 | 14.39,44.07 14.5,44.54 | 14.5,44.54 IC$3P.6 | 11.98,44.45 Q10.P$2
  Top 0.546: 19.34,36.58 19.09,37.21
  Top 0.584: 18.96,36.63 17.31,36.63
  Top 0.61: Q5.P$2 19.08,37.71 19.09,37.21 18.96,36.63 | 19.34,36.58 19.47,36.2 20.23,34.29 19.98,33.53 Q6.P$3 | v16.04,40.64 17.11,39.88 17.11,37.34 17.31,36.63
  Bottom 0.61: v16.04,40.64 16.04,42.04 15.66,42.42 14.39,42.93 v14.39,43.94
N$27  (via drill 0.33)
  Top 0.356: v19.98,44.2 C11.2
  Bottom 0.305: 22.14,46.61 IC$4.4
  Bottom 0.406: v19.98,44.2 22.14,46.61
N$28  (via drill 0.33)
  Top 0.406: R1.2 v21.37,20.83 | v20.74,15.37 U1.D+
  Bottom 0.406: v20.74,15.37 23.91,16.26 24.37,17.02 24.37,18.8 22.77,19.18 22.26,20.32 v21.37,20.83
N$29
  Top 0.406: U$3.P$3 R20.2 17.82,4.19 R21.1
N$30  (via drill 0.33)
  Top 0.406: v6.64,50.67 9.56,50.67 9.56,48.26 9.06,47.75 C18.2
  Bottom 0.406: v6.64,50.67 5.25,50.42 IC$4.28
N$31
  Top 0.305: IC$3P.2 14.01,39.8
  Top 0.406: R14.2 9.31,40.89 10.83,41.4 11.72,42.19 13.63,42.19 13.75,41.53 IC$3P.2 | 14.01,39.8 15.53,39.8 R13.2
N$32
  Top 0.406: R2.2 20.1,14.22 20.61,14.35 21.88,14.73 U1.D-
OAOUT1  (via drill 0.33)
  Top 0.284: 15.71,45.99 13.88,45.99
  Top 0.29: 13.88,45.99 IC$3P.7 | 15.71,45.99 15.79,45.21
  Top 0.305: 15.79,45.21 15.79,44.7 16.17,44.2
  Top 0.406: 17.18,42.66 18.58,42.29 18.45,42.29 | 15.71,42.93 15.41,42.8 14.52,42.16 IC$3P.3 | IC$3P.7 13.75,45.09
  Top 0.61: 18.45,42.29 16.09,42.84 15.71,42.93 | R9.1 v19.98,37.34 | v19.98,39.88 20.98,39.75
  Top 0.813: C6.1 18.58,42.29 | C7.1 20.98,39.75 R8.1 C6.1 | R9.1 C8.1 21.25,34.67 21.25,34.04 R10.1 C9.1 | C6.1 21.25,44.7 R7.1 | 16.17,44.2 16.09,42.84
  Bottom 0.61: v19.98,37.34 v19.98,39.88
OAOUT2
  Top 0.254: 9.44,39.5 8.55,38.73 IC$1.15
  Top 0.363: 13.26,40.01 13.64,39.26 14.52,39.26
  Top 0.368: 13.26,40.01 IC$3P.1 | 14.52,39.26 R13.1
  Top 0.406: 12.87,40.51 IC$3P.1
  Top 0.61: 9.44,39.5 11.63,40.49 | 11.63,40.49 11.21,40.26 | 12.87,40.51 11.63,40.49
OAPWR  (via drill 0.33)
  Top 0.229: Q12.P$1 26.95,40.84
  Top 0.254: 26.95,40.84 26.95,39.62 26.73,38.48
  Top 0.305: 26.73,38.48 27.42,38.23 27.42,36.45 R15.1 v26.73,36.7
  Top 0.406: v14.52,35.43 13.37,35.56 13.37,37.57 IC$3.10
  Bottom 0.305: 24.8,33.78 v26.73,36.7
  Bottom 0.406: v14.52,35.43 15.15,34.93 15.91,34.54 16.42,34.16 18.71,34.16 19.34,34.8 24.8,33.78
PBI$1  (via drill 0.33)
  Top 0.254: v3.21,34.67 3.34,35.69 IC$1.5 | v8.62,31.62 v8.67,29.11
  Top 0.406: D7.A v11.98,18.42 | S$1.P$1 8.8,28.19 v8.67,29.11
  Bottom 0.203: v8.62,31.62 7.15,32.49 3.34,32.49
  Bottom 0.254: 3.34,32.49 v3.21,34.67
  Bottom 0.406: v11.98,18.42 10.33,20.45 7.4,22.1 7.15,23.37 7.4,24.64 7.4,27.3 8.17,28.58 v8.67,29.11
PBI$2  (via drill 0.33)
  Top 0.254: v3.37,31.83 3.39,33.27 3.9,33.66 3.9,35.31 4.1,35.43 IC$1.6 | v7.15,28.58 7.28,28.96 v7.38,30.35
  Top 0.406: v19.34,23.75 S$3.P$1 | v19.72,17.91 D7.C | S$2.P$1 v1.82,24.89
  Bottom 0.203: 14.14,31.88 12.87,31.93 9.94,32 9.69,31.93 9.44,31.01 8.17,31.01 7.53,31.24
  Bottom 0.254: v1.82,24.89 6.77,25.53 6.9,26.04 6.9,26.92 6.77,27.69 v7.15,28.58 | 3.21,30.99 4.1,30.48 4.61,30.35 6.64,30.35 6.64,30.86 7.53,31.24
  Bottom 0.305: 14.14,31.88 14.26,31.24 14.52,29.21 v19.34,23.75 | v3.37,31.83 3.21,30.99
  Bottom 0.406: v19.34,23.75 20.23,22.35 20.23,20.7 v19.72,17.91 | v7.38,30.35 7.53,30.48 7.53,31.24
SCRCLK  (via drill 0.33)
  Top 0.254: v12.23,41.48 11.21,41.02 8.93,40.01 v8.65,39.95 | v13.45,47.16 14.01,47.75 16.42,47.75 16.8,47.47 16.8,46.99 v17.27,46.22 | IC$1.16 v7.4,39.95
  Bottom 0.254: v13.45,47.16 12.23,47.37 IC$4.18 | v17.27,46.22 17.18,46.74 15.66,46.74 15.66,45.34 16.55,42.55 16.68,42.04 16.68,39.5 15.28,40.01 13.37,40.89 12.81,41.13 | v12.23,41.48 12.81,41.13 | 12.81,41.13 12.99,41.02 | v7.4,39.95 v8.65,39.95
SCRCS  (via drill 0.33)
  Top 0.254: v8.04,36.09 IC$1.11
  Bottom 0.229: IC$4.13 16.04,47.37
  Bottom 0.254: 16.04,47.37 17.92,47.12
  Bottom 0.292: 8.8,36.14 9.69,36.14 10.2,36.2
  Bottom 0.305: 8.8,36.14 v8.04,36.09 | 10.2,36.2 10.58,36.25 14.52,36.5 16.11,36.47 16.17,37.08 16.55,37.08 16.93,37.47 16.93,38.23 17.56,38.73 17.72,39.12 17.82,42.04 17.82,44.96 17.95,45.72 17.95,46.61 17.92,47.12
SCRDAT  (via drill 0.33)
  Top 0.203: IC$1.19 5.25,41.5 4.86,41.66 v4.41,41.94
  Top 0.305: v9.59,43.76 11.34,43.56 v12.48,43.43
  Bottom 0.203: 11.6,47.4 8.04,47.4 7.66,46.86
  Bottom 0.241: 7.66,46.18 11.47,46.18
  Bottom 0.254: 12.36,46.18 11.47,46.18 | IC$4.19 11.6,47.4 | 7.66,46.86 7.66,46.18
  Bottom 0.305: v9.59,43.76 9.44,44.57 7.66,44.57 7.79,42.85 4.86,42.85 4.74,42.72 v4.41,41.94 | v12.48,43.43 12.36,46.18
SCRDC  (via drill 0.33)
  Top 0.254: IC$1.20 4.76,41.27 2.71,41.27 | 1.05,44.7 3.14,44.7 | 3.14,47.5 2.2,47.88 2.2,48.9 2.83,48.9 3.21,49.53 3.21,51.44 10.2,51.44 10.2,48.39 v9.49,46.8
  Top 0.305: 1.05,44.7 1.05,42.55 1.44,42.42 2.45,42.29 2.71,41.27 | 3.14,44.7 3.14,47.5
  Bottom 0.305: 14.39,48.67 IC$4.15 14.1,46.61 13.78,46.33 12.1,46.71 10.2,46.86 v9.49,46.8
SCRPWR  (via drill 0.33)
  Top 0.178: 18.07,31.24 19.09,31.24 19.09,32.26 18.83,32.51 18.45,32.92
  Top 0.254: 18.07,31.24 17.31,31.24 17.01,31.37 17.01,32.26 16.29,32.26 15.41,32.26 14.52,33.66 13.37,33.61 13.35,32.77 12.48,32.77 IC$3.3 | 18.45,32.92 17.56,33.05 17.56,33.91 R11.1
  Top 0.305: IC$3.3 12.1,31.12 11.85,30.86 v11.34,30.48 | v13.5,27.18 13.5,26.54 10.2,26.54 R25.2
  Top 0.356: Q16.P$1 7.66,27.3 9.06,27.3 9.31,26.67
  Top 0.406: 9.31,26.67 R25.2 | Q7.P$1 16.29,32.26
  Bottom 0.305: v11.34,30.48 11.98,30.99 13.25,30.99 13.25,28.07 v13.5,27.18
SCRRES  (via drill 0.33)
  Top 0.254: IC$1.1 3.63,38.77
  Top 0.279: 3.63,38.77 v3.65,39.62
  Bottom 0.229: 14.97,48.66 14.72,46.99
  Bottom 0.254: 12.1,42.67 11.72,43.05 11.72,45.76 10.45,45.72 10.2,45.47 10.2,45.09 7.15,45.09 7.15,44.32 | 14.72,46.99 14.44,46.1
  Bottom 0.305: v3.65,39.62 3.47,40.01 3.44,41.66 3.7,42.34 4.48,43.36 7.15,43.38 7.15,44.32 | 12.1,42.67 13.25,42.8 13.25,45.34 14.44,46.1 | 14.97,48.66 IC$4.14
SCRVREG  (via drill 0.33)
  Top 0.356: C12.2 25.82,48.13 25.57,48.77 v25.18,49.78
  Top 0.406: Q7.P$3 v16.04,35.64
  Bottom 0.305: 18.58,48.68 IC$4.9
  Bottom 0.356: v25.18,49.78 24.68,50.42 21.12,50.42 20.74,50.04 IC$4.6
  Bottom 0.406: 18.58,49.4 IC$4.9 18.58,48.01 | 18.58,46.99 18.58,45.72 18.45,45.21 18.33,38.86 17.82,38.23 17.44,37.97 17.44,37.21 17.31,36.96 v16.04,35.64 | 18.58,46.99 18.58,48.01 | 18.58,48.68 18.58,48.01 | 18.58,46.99 20.49,46.99 20.61,47.24 IC$4.6
SRA  (via drill 0.33)
  Top 0.203: 3.11,37.69 2.96,37.72
  Top 0.229: 2.96,37.72 IC$1.3
  Top 0.254: IC$3.1 11.47,32 11.85,32.89 v12.66,33.4 | 2.86,37.72 3.11,37.69
  Top 0.305: IC$3.2 IC$3.1 | v1.85,37.41 2.86,37.72
  Bottom 0.152: 10.53,33.71 10.33,33.58 7.79,33.6 7.28,33.71
  Bottom 0.203: v12.66,33.4 11.54,33.76 10.53,33.71 | 7.28,33.71 6.01,34.34 5.5,34.93 5.37,35.43 3.34,35.56 2.96,35.94
  Bottom 0.254: 2.96,35.94 v1.85,37.41
SRCLK  (via drill 0.33)
  Top 0.254: 8.93,37.72 IC$1.13
  Top 0.305: 8.93,37.72 9.44,37.21 v9.4,36.91 | v15.41,37.16 IC$3.8
  Bottom 0.305: v9.4,36.91 14.26,36.96 v15.41,37.16
STG$1  (via drill 0.33)
  Top 0.254: 26,38.7 26.51,39.75
  Top 0.279: 26.51,39.75 26.51,40.72 25.18,40.77
  Top 0.305: Q4.P$1 24.94,32.63 24.17,33.4 24.17,34.27 Q3.P$1 | Q3.P$1 24.94,35.17 | 25.18,40.77 25.06,40.64 25.06,40.24 Q1.P$1 | Q3.P$1 24.93,35.56 25.06,35.69 26.07,35.69 26.07,36.7 25.95,36.96 25.18,36.96 24.94,37.2 Q2.P$1 24.94,37.98 25.18,38.23 26,38.23 26,38.7
  Top 0.406: IC$3.5 13.39,30.47 v15.91,29.84 | v23.66,32.38 24.93,32.51 Q4.P$1
  Bottom 0.406: v23.66,32.38 21.76,30.1 19.47,29.46 18.2,29.46 18.07,29.34 17.06,28.45 16.68,28.96 v15.91,29.84
STG$2  (via drill 0.33)
  Top 0.305: Q6.P$1 18.14,32.45 | IC$3.6 14.01,31.12 14.26,30.86 16.17,30.61 16.8,30.23 v17.18,29.97 | v17.69,31.88 18.14,32.45 | v17.23,35.05 17.13,35.18 17.13,33.55 17.06,32.82 17.18,32.66 17.56,32.56 18.14,32.45
  Top 0.406: v18.15,37.41 Q5.P$1 | 18.07,38.35 Q5.P$1 | Q5.P$1
  Bottom 0.305: v17.18,29.97 19.22,29.97 20.61,30.35 20.36,31.5 19.09,31.5 v17.69,31.88
  Bottom 0.406: v17.23,35.05 17.69,36.32 v18.15,37.41
VBAT
  Top 0.406: 3.2,14.12 J2.2
  Top 0.61: 3.2,14.12 3.59,14.48 5.88,14.48 | IC$5.3 21.88,25.29 18.83,25.29 18.07,25.91 16.42,25.91 C15.1 15.53,25.78 10.6,25.78 10.6,23.5 9.06,23.5 | 5.88,14.48 5.88,16.64 5.37,17.53 5.37,19.94 8.29,19.94 8.93,21.84 9.06,23.5 | R18.2 5.25,24.77 8.42,24.77 8.67,24.13 9.06,23.5 | 5.88,14.48 10.2,14.48 D1.A
VCC
  Top 0.356: C1.2 12.38,24 12.38,22.34 12.99,22.33
  Top 0.368: IC$2.1 12.99,22.1 12.99,22.33
  Top 0.406: IC$2.1 13.06,19.75 13.37,18.92 14.9,18.92 15.11,19.68 IC$2.3
  Top 0.61: 15.27,19.42 15.28,19.18 16.17,17.91 16.17,16.13 D1.C | 15.27,19.42 15.23,19.56 15.11,19.68 | D2.C 15.27,19.42
VREG  (via drill 0.33)
  Top 0.203: IC$6.P$1 3.72,30.99 3.8,30.61 3.8,28.96 3.92,28.45 3.09,28.58 3.09,28.07 2.32,28.07 2.32,27.43 R3.1
  Top 0.229: C3.1 3.84,28.59 3.8,28.96 | IC$6.P$8 5.12,29.84 C13.1 6.1,30.86 6.1,31.62 4.61,31.62 4.1,31.37 3.72,30.86 3.8,30.61
  Top 0.254: C16.1 6.34,34.42 | 4.1,31.37 R4.1 | IC$1.9 6.39,34.42 v5.8,33.53
  Top 0.279: 6.26,35.05 IC$1.9 | 14.77,47.24 14.64,46.43 | 7.35,32.51 7.35,31.24
  Top 0.292: 13.25,46.43 14.64,46.43
  Top 0.305: 6.34,34.42 6.26,35.05 | IC$3P.8 13.25,46.43 | v16.43,45.47 16.29,47.24 14.77,47.24 | R25.1 v8.73,25.65 | C16.1 7.08,32.9 7.35,32.51 | 4.1,31.37 3.72,30.99 | 7.35,31.24 6.77,30.99 C13.1
  Top 0.356: 13.29,38.73 12.91,39.39 | 16.55,34.16 15.28,34.16
  Top 0.381: IC$3.14 10.77,38.23 | 15.28,34.16 15.28,36.32 | 5.5,26.2 2.32,26.2
  Top 0.394: 10.83,39.39 12.91,39.39
  Top 0.406: 14.77,36.2 14.14,36.22 | 14.14,36.22 14.01,37.56 IC$3.9 14.01,38.48 13.88,38.58 13.29,38.73 | IC$3P.8 12.61,45.72 12.61,48.26 16.55,48.26 C14.1 | 10.83,39.39 10.77,39.24 10.77,38.23 | v16.24,37.9 16.29,37.34 16.42,36.45 | 16.42,36.45 15.28,36.32 14.14,36.22 | v16.04,23.5 14.87,23.8 | IC$2.4 15.29,22.75 | 15.29,22.75 15.53,22.48 | Q7.P$2 16.55,34.16 | R21.2 21.37,5.46 22.14,3.05 J1.2 | R21.2 v20.99,6.73 | v16.17,21.97 15.29,22.75 | v8.73,25.65 8.42,25.45 5.5,25.45 5.5,26.2 | 2.32,26.2 R3.1 | C4.2 11.6,6.6 11.6,3.56 15.28,4.06 R21.2 | v11.09,33.1 11.47,34.8 10.83,36.32 IC$3.14 | R11.2 18.2,35.94 16.93,35.94 16.42,36.45
  Top 0.61: IC$2.4 14.87,23.8 L2.2
  Bottom 0.254: v11.09,33.1 9.82,33.07 9.18,33.15 7.79,33.17 7.4,33.25 6.26,33.66 v5.8,33.53
  Bottom 0.406: v16.43,45.47 16.8,43.43 17.18,42.42 17.18,39.24 16.29,38.48 v16.24,37.9 | v8.73,25.65 10.96,25.65 v16.04,23.5 | v20.99,6.73 17.69,12.83 17.44,14.61 16.93,16.51 16.04,20.45 v16.17,21.97
VUSB
  Top 0.406: 24.19,21.46 24.19,25.53 | 24.19,21.46 24.68,18.67 24.8,18.16 24.93,17.27 24.93,14.1 24.04,14.1 U1.VBUS 22.01,14.1 21.88,13.46 | IC$5.4 21.76,29.92 | 24.19,21.46 24.04,21.08 22.39,21.08 22.39,21.59 19.72,21.59 D2.A
  Top 0.61: 24.19,25.53 R17.2 24.68,27.56 24.68,28.7 24.55,29.84 22.9,29.92 21.76,29.92 | 21.88,13.46 21.12,12.57 20.23,11.68 19.22,10.29 C17.2